# EAGLE board DMB-4771-8-IN-8-OUT (EAGLE 6.5.0)
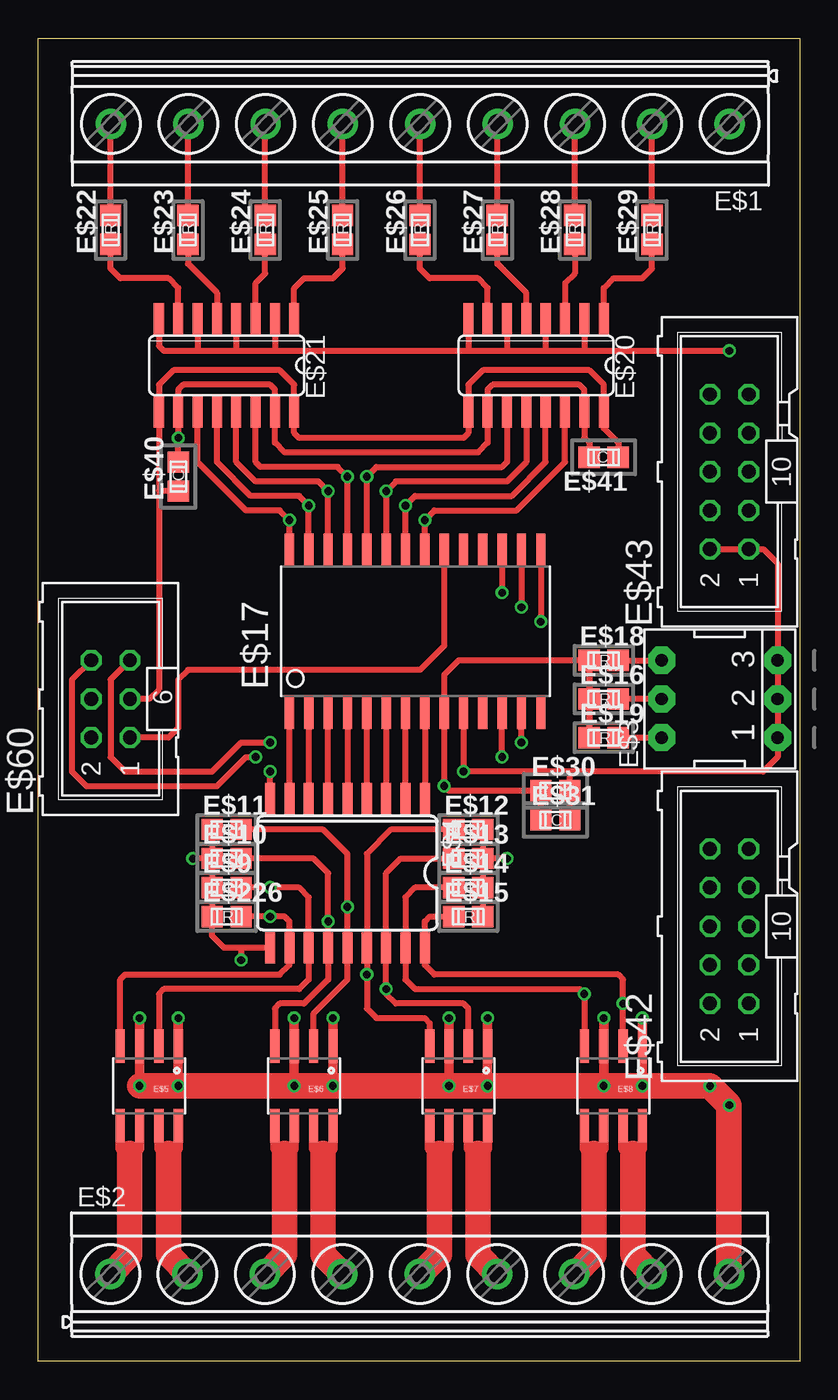
[diagram p0: board, top side]
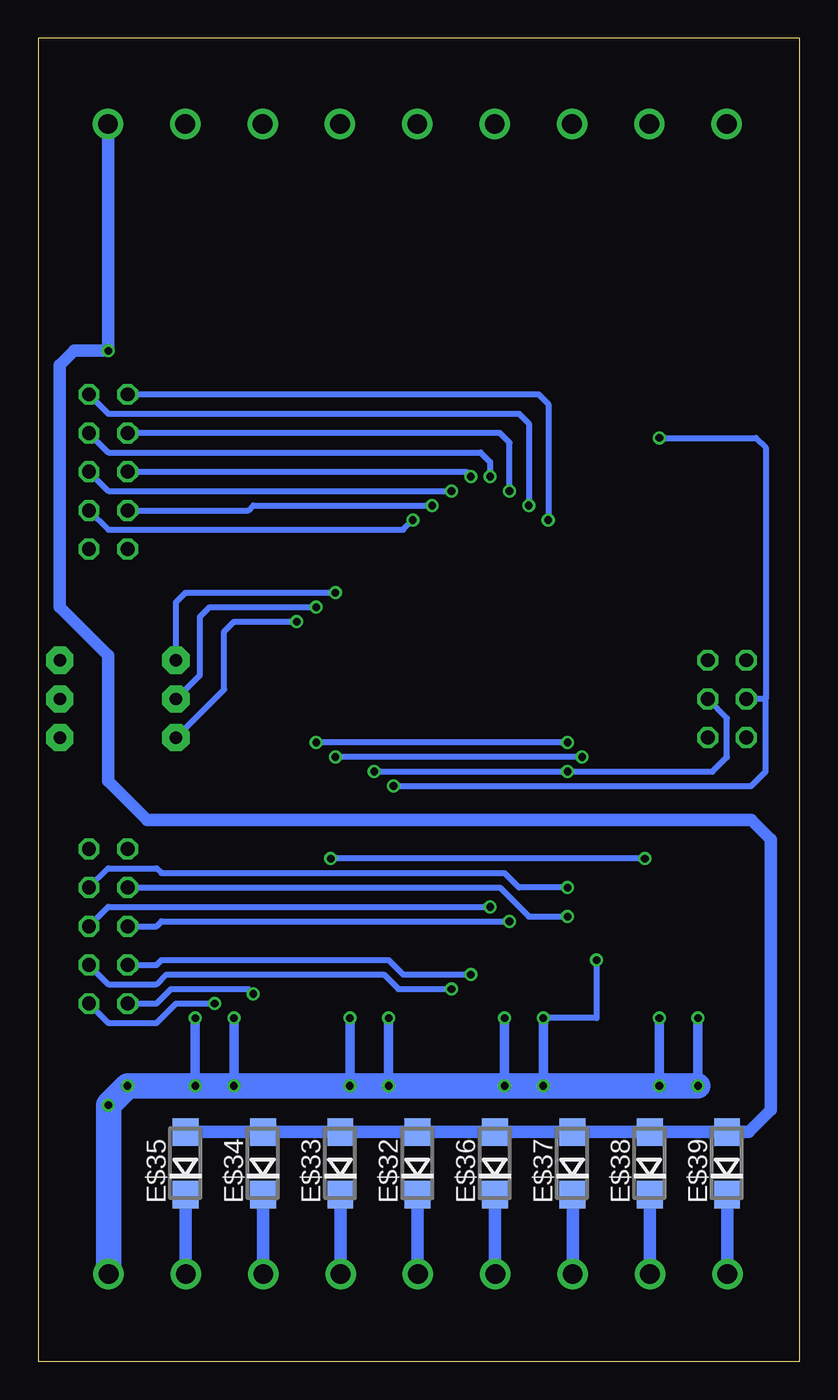
[diagram p1: board, bottom side, seen from below]

Size 50.01 x 86.89 mm. Coordinates in mm from the lower left corner, seen from the top.
Outline: 0,86.89 50.01,86.89 50.01,0 0,0 0,86.89
Copper layers (1*16): Top 0.0356mm / dielectric 1.5011mm / Bottom 0.0356mm
Design rules "LaenPCBOrder": minimum track width 6mil, minimum drill 13mil, track to track 6mil, track to pad 6mil, pad to pad 6mil, via to via 6mil, smd to smd 6mil, copper to edge 15mil, drill to drill 6mil, minimum pad ring 7mil, minimum via ring 7mil, stop-mask expansion 3mil, vias tented up to drill 0mil, thermal gap 10mil

## Footprints (pad centres in the part's own frame; a part is rotated, then mirrored left to right if it is on the bottom)
MKDSN1,5/9-5,08 = drill 1.3 pad 2: 1 -20.341,0.025; 2 -15.261,0.025; 3 -10.181,0.025; 4 -5.101,0.025; 5 -0.021,0.025; 6 5.059,0.025; 7 10.139,0.025; 8 15.219,0.025; 9 20.299,0.025
EPG-03-SMALL = drill 0.813 pad 1.778 octagon: 1 -2.54,-3.81; 2 0,-3.81; 3 2.54,-3.81; 4 2.54,3.81; 5 0,3.81; 6 -2.54,3.81
SO18L = smd 0.66 x 2.032: 1 -0.635,-4.902; 2 0.635,-4.902; 3 1.905,-4.902; 4 3.175,-4.902; 5 4.445,-4.902; 6 5.715,-4.902; 7 6.985,-4.902; 8 8.255,-4.902; 9 9.525,-4.902; 10 9.525,4.902; 11 8.255,4.902; 12 6.985,4.902; 13 5.715,4.902; 14 4.445,4.902; 15 3.175,4.902; 16 1.905,4.902; 17 0.635,4.902; 18 -0.635,4.902
SOIC8 = smd 0.61 x 2.21: 1 -1.905,-2.616; 2 -0.635,-2.616; 3 0.635,-2.616; 4 1.905,-2.616; 5 1.905,2.616; 6 0.635,2.616; 7 -0.635,2.616; 8 -1.905,2.616
R0805 = smd 1.397 x 1.397: 1 -0.953,0; 2 0.953,0
SO28-3 = smd 0.61 x 2.21: 1 -8.255,-5.315; 2 -6.985,-5.315; 3 -5.715,-5.315; 4 -4.445,-5.315; 5 -3.175,-5.315; 6 -1.905,-5.315; 7 -0.635,-5.315; 8 0.635,-5.315; 9 1.905,-5.315; 10 3.175,-5.315; 11 4.445,-5.315; 12 5.715,-5.315; 13 6.985,-5.315; 14 8.255,-5.315; 15 8.255,5.315; 16 6.985,5.315; 17 5.715,5.315; 18 4.445,5.315; 19 3.175,5.315; 20 1.905,5.315; 21 0.635,5.315; 22 -0.635,5.315; 23 -1.905,5.315; 24 -3.175,5.315; 25 -4.445,5.315; 26 -5.715,5.315; 27 -6.985,5.315; 28 -8.255,5.315
SO16 = smd 0.66 x 2.032: 1 -4.445,-3.073; 2 -3.175,-3.073; 3 -1.905,-3.073; 4 -0.635,-3.073; 5 0.635,-3.073; 6 1.905,-3.073; 7 3.175,-3.073; 8 4.445,-3.073; 9 4.445,3.073; 10 3.175,3.073; 11 1.905,3.073; 12 0.635,3.073; 13 -0.635,3.073; 14 -1.905,3.073; 15 -3.175,3.073; 16 -4.445,3.073
C0805 = smd 1.397 x 1.397: 1 -0.953,0; 2 0.953,0
DO214AC = smd 1.8 x 1.7: A 2.05,0; C -2.05,0
ML10 = drill 0.914 octagon: 1 -5.08,-1.27; 2 -5.08,1.27; 3 -2.54,-1.27; 4 -2.54,1.27; 5 0,-1.27; 6 0,1.27; 7 2.54,-1.27; 8 2.54,1.27; 9 5.08,-1.27; 10 5.08,1.27
ML6 = drill 0.914 octagon: 1 -2.54,-1.27; 2 -2.54,1.27; 3 0,-1.27; 4 0,1.27; 5 2.54,-1.27; 6 2.54,1.27

## Placement (x,y rotation side)
E$1  [MKDSN1,5/9-5,08]  25.08,81.28 180 top
E$2  [MKDSN1,5/9-5,08]  25.08,5.71 0 top
E$3  [EPG-03-SMALL]  44.77,43.5 90 top
E$4  ULN2803  [SO18L]  24.77,32.07 180 top
E$5  [SOIC8]  7.3,18.1 180 top
E$6  [SOIC8]  17.46,18.1 180 top
E$7  [SOIC8]  27.62,18.1 180 top
E$8  [SOIC8]  37.78,18.1 180 top
E$9  10K  [R0805]  12.38,31.11 0 top
E$10  10K  [R0805]  12.38,33.02 0 top
E$11  10K  [R0805]  12.38,34.92 0 top
E$12  10K  [R0805]  28.26,34.92 0 top
E$13  10K  [R0805]  28.26,33.02 0 top
E$14  10K  [R0805]  28.26,31.11 0 top
E$15  10K  [R0805]  28.26,29.21 0 top
E$16  10K  [R0805]  37.15,43.5 0 top
E$17  MCP23017  [SO28-3]  24.77,47.94 0 top
E$18  10K  [R0805]  37.15,46.04 0 top
E$19  10K  [R0805]  37.15,40.96 0 top
E$20  ACSL-6400  [SO16]  32.7,65.41 180 top
E$21  ACSL-6400  [SO16]  12.38,65.41 180 top
E$22  1.30K  [R0805]  4.76,74.3 90 top
E$23  1.30K  [R0805]  9.84,74.3 90 top
E$24  1.30K  [R0805]  14.92,74.3 90 top
E$25  1.30K  [R0805]  20,74.3 90 top
E$26  1.30K  [R0805]  25.08,74.3 90 top
E$27  1.30K  [R0805]  30.16,74.3 90 top
E$28  1.30K  [R0805]  35.24,74.3 90 top
E$29  1.30K  [R0805]  40.32,74.3 90 top
E$30  100n  [C0805]  33.97,37.47 0 top
E$31  1u  [C0805]  33.97,35.56 0 top
E$32  [DO214AC]  25.08,13.02 90 bottom
E$33  [DO214AC]  30.16,13.02 90 bottom
E$34  [DO214AC]  35.24,13.02 90 bottom
E$35  [DO214AC]  40.32,13.02 90 bottom
E$36  [DO214AC]  20,13.02 90 bottom
E$37  [DO214AC]  14.92,13.02 90 bottom
E$38  [DO214AC]  9.84,13.02 90 bottom
E$39  [DO214AC]  4.76,13.02 90 bottom
E$40  100n  [C0805]  9.21,58.1 90 top
E$41  100n  [C0805]  37.15,59.37 180 top
E$42  [ML10]  45.4,28.57 90 top
E$43  [ML10]  45.4,58.42 90 top
E$60  [ML6]  4.76,43.5 90 top
E$226  10K  [R0805]  12.38,29.21 0 top

## Library data of the parts
E$1 E$2 = con-phoenix-508
E$3 = special
E$4 = SparkFun-PowerIC
E$5-E$8 = SparkFun-AnalogIC
E$9-E$16 E$18 E$19 E$22-E$31 E$40 E$41 E$226 = divers
E$17 = burr-brown
E$20 E$21 = linear
E$32-E$39 = ref-packages
E$42 E$43 E$60 = con-harting-ml

## Nets
3V3: E$16.1 E$17.9 E$18.1 E$19.1 E$20.10 E$20.15 E$21.10 E$21.15 E$30.1 E$31.1 E$40.2 E$41.2 E$60.4
GND: E$3.1 E$3.2 E$3.3 E$4.9 E$17.10 E$20.9 E$20.16 E$21.9 E$21.16 E$30.2 E$31.2 E$40.1 E$41.1 E$43.1 E$43.2 E$60.3
INT1: E$17.20 E$60.1
POWER_GND: E$1.1 E$20.2 E$20.4 E$20.6 E$20.8 E$21.2 E$21.4 E$21.6 E$21.8 E$32.A E$33.A E$34.A E$35.A E$36.A E$37.A E$38.A E$39.A
S$9: E$2.9 E$4.10 E$5.1 E$5.3 E$6.1 E$6.3 E$7.1 E$7.3 E$8.1 E$8.3 E$9.1 E$10.1 E$11.1 E$12.2 E$13.2 E$14.2 E$15.2 E$226.1
S$11: E$2.1 E$5.5 E$5.6 E$39.C
S$13: E$2.2 E$5.7 E$5.8 E$38.C
S$14: E$2.3 E$6.5 E$6.6 E$37.C
S$15: E$17.28 E$21.11 E$43.10
S$16: E$2.5 E$7.5 E$7.6 E$32.C
S$20: E$4.11 E$5.4 E$42.8 E$226.2
S$21: E$4.12 E$5.2 E$9.2 E$42.7
S$23: E$4.13 E$6.4 E$10.2 E$42.6
S$25: E$4.14 E$6.2 E$11.2 E$42.5
S$28: E$4.15 E$7.4 E$12.1 E$42.4
S$29: E$4.16 E$7.2 E$13.1 E$42.3
S$31: E$4.17 E$8.4 E$14.1 E$42.2
S$32: E$4.18 E$8.2 E$15.1 E$42.1
S$33: E$4.8 E$17.1
S$34: E$4.7 E$17.2
S$35: E$4.6 E$17.3
S$38: E$4.5 E$17.4
S$39: E$4.4 E$17.5
S$40: E$4.3 E$17.6
S$41: E$4.2 E$17.7
S$42: E$4.1 E$17.8
S$55: E$3.4 E$17.17 E$18.2
S$59: E$3.5 E$16.2 E$17.16
S$66: E$3.6 E$17.15 E$19.2
S$67: E$2.6 E$7.7 E$7.8 E$33.C
S$68: E$2.7 E$8.5 E$8.6 E$34.C
S$70: E$2.8 E$8.7 E$8.8 E$35.C
S$71: E$2.4 E$6.7 E$6.8 E$36.C
S$74: E$21.7 E$22.1
S$75: E$21.5 E$23.1
S$76: E$21.3 E$24.1
S$77: E$1.9 E$22.2
S$78: E$1.8 E$23.2
S$79: E$1.7 E$24.2
S$80: E$1.6 E$25.2
S$81: E$1.5 E$26.2
S$82: E$1.4 E$27.2
S$83: E$1.3 E$28.2
S$84: E$1.2 E$29.2
S$85: E$21.1 E$25.1
S$86: E$20.7 E$26.1
S$90: E$17.27 E$21.12 E$43.9
S$91: E$17.26 E$21.13 E$43.8
S$92: E$17.25 E$21.14 E$43.7
S$93: E$17.24 E$20.11 E$43.6
S$94: E$17.23 E$20.12 E$43.5
S$95: E$17.22 E$20.13 E$43.4
S$96: E$17.21 E$20.14 E$43.3
S$97: E$20.5 E$27.1
S$98: E$20.3 E$28.1
S$99: E$20.1 E$29.1
SCL: E$17.12 E$60.6
SDA: E$17.13 E$60.5

## Tracks (layer width: path | path; a pad name or v marks a point on that pad's centre or on a via)
3V3  (via drill 0.5)
  Top 0.406: E$31.1 E$30.1 26.99,37.47 v26.67,37.78 E$17.9 26.67,45.09 27.62,46.04 E$18.1 E$19.1 E$16.1 E$18.1 | E$40.2 v9.21,60.64 E$21.10 9.21,63.82 9.53,64.14 15.24,64.14 15.56,63.82 E$21.15 15.56,60.33 16.19,59.69 28.89,59.69 29.53,60.33 E$20.10 29.53,63.82 29.84,64.14 35.56,64.14 35.88,63.82 E$20.15 35.88,60.64 36.2,60.33 E$41.2
  Bottom 0.406: v26.67,37.78 3.17,37.78 2.22,38.73 2.22,43.5 | v9.21,60.64 2.86,60.64 2.22,60.01 2.22,43.5 | 2.22,43.5 E$60.4
GND  (via drill 0.5)
  Top 0.406: E$17.10 v27.94,38.73 34.92,38.73 | E$4.9 v15.24,38.73 | 34.92,38.73 47.62,38.73 48.58,39.69 E$3.1 E$3.2 E$3.3 48.58,52.39 47.62,53.34 E$43.1 E$43.2 | 34.92,38.73 E$30.2 E$31.2 | 7.94,57.15 E$21.9 7.94,64.14 8.89,65.09 15.88,65.09 16.83,64.14 E$21.16 16.83,60.96 17.14,60.64 27.94,60.64 28.26,60.96 E$20.9 28.26,64.14 29.21,65.09 36.2,65.09 37.15,64.14 E$20.16 37.15,61.28 38.1,60.33 E$41.1 | 7.94,57.15 7.94,44.13 7.3,43.5 E$60.3 | E$40.1 7.94,57.15
  Bottom 0.406: v27.94,38.73 v15.24,38.73 5.71,38.73 4.76,39.69 4.76,42.23 E$60.3
INT1
  Top 0.406: E$17.20 26.67,46.99 25.08,45.4 9.84,45.4 9.21,44.77 9.21,41.59 8.57,40.96 E$60.1
POWER_GND  (via drill 0.5)
  Top 0.406: E$21.8 7.94,66.67 8.26,66.36 10.48,66.36 | 10.48,66.36 13.02,66.36 | 13.02,66.36 15.56,66.36 | 15.56,66.36 28.26,66.36 | 28.26,66.36 30.8,66.36 | 30.8,66.36 33.34,66.36 | 33.34,66.36 35.88,66.36 | 35.88,66.36 v45.4,66.36 | E$20.2 35.88,66.36 | E$20.4 33.34,66.36 | E$20.6 30.8,66.36 | E$20.8 28.26,66.36 | E$21.2 15.56,66.36 | E$21.4 13.02,66.36 | E$21.6 10.48,66.36
  Bottom 0.813: E$1.1 45.4,81.06 v45.4,66.36 47.62,66.36 48.58,65.41 48.58,49.53 45.4,46.35 45.4,38.1 42.86,35.56 3.17,35.56 1.91,34.29 1.91,16.51 3.35,15.07 E$39.A E$38.A E$37.A E$36.A E$32.A E$33.A E$34.A E$35.A
S$9  (via drill 0.5)
  Top 0.406: E$11.1 E$10.1 | E$10.1 | E$10.1 E$9.1 E$226.1 11.43,27.94 12.21,27.16 E$4.10 13.34,27.16 v13.34,26.35 | E$12.2 E$13.2 | E$13.2 E$14.2 E$15.2 | E$10.1 v10.16,33.02 | v30.8,33.02 E$13.2
  Top 0.61: v6.67,18.1 E$5.3 v6.67,22.54 | v9.21,18.1 E$5.1 v9.21,22.54 | v16.83,18.1 E$6.3 v16.83,22.54 | v19.37,18.1 E$6.1 v19.37,22.54 | v26.99,18.1 E$7.3 v26.99,22.54 | 29.21,18.1 29.53,18.41 E$7.1 v29.53,22.54 | 37.47,18.1 37.15,18.41 E$8.3 v37.15,22.54 | v39.69,18.1 E$8.1 v39.69,22.54
  Top 1.27: 37.47,18.1 v37.15,18.1 | v29.53,18.1 29.21,18.1
  Top 1.676: E$2.9 45.38,16.85 v44.13,18.1 v39.69,18.1 37.47,18.1 | v37.15,18.1 v29.53,18.1 | 29.21,18.1 v26.99,18.1 v19.37,18.1 v16.83,18.1 v9.21,18.1 v6.67,18.1
  Bottom 0.406: v10.16,33.02 v30.8,33.02 | v13.34,26.35 13.34,22.54 v16.83,22.54
  Bottom 0.61: v6.67,22.54 v6.67,18.1 | v9.21,22.54 v9.21,18.1 | v29.53,18.1 v29.53,22.54 | v26.99,22.54 v26.99,18.1 | v16.83,18.1 v16.83,22.54 | v19.37,22.54 v19.37,18.1 | v37.15,22.54 v37.15,18.1 | v39.69,22.54 v39.69,18.1
  Bottom 1.676: E$2.9 45.38,16.85 v44.13,18.1 v39.69,18.1 v37.15,18.1 v29.53,18.1 v26.99,18.1 v19.37,18.1 v16.83,18.1 v9.21,18.1 v6.67,18.1
S$11
  Top 0.61: E$5.5 5.4,13.97 6.03,13.65 | 4.76,5.76 E$2.1 | E$5.6 6.67,13.97 6.35,13.65 6.03,6.99
  Top 1.676: 6.03,13.65 6.03,6.99 4.76,5.71 4.76,5.76
  Bottom 0.813: E$2.1 4.74,10.95 E$39.C
S$13
  Top 0.61: E$5.8 9.21,13.97 8.57,13.65 7.94,13.97 E$5.7
  Top 1.676: 8.57,13.65 8.57,6.99 E$2.2
  Bottom 0.813: E$38.C 9.84,5.76 E$2.2
S$14
  Top 0.61: E$6.5 15.56,13.97 16.19,13.65 | E$6.6 16.83,13.97 16.51,13.65 16.19,6.99
  Top 1.676: 16.19,13.65 16.19,6.99 14.9,5.69 E$2.3
  Bottom 0.813: E$2.3 14.9,10.95 E$37.C
S$15  (via drill 0.5)
  Top 0.406: E$21.11 10.48,59.05 13.65,55.88 15.88,55.88 v16.51,55.24 E$17.28
  Bottom 0.406: E$43.10 17.14,63.5 16.51,62.87 v16.51,55.24
S$16
  Top 0.61: E$7.5 25.72,13.97 26.35,13.65 | E$7.6 26.99,13.97 26.67,13.65 26.35,6.99
  Top 1.676: 26.35,13.65 26.35,6.99 25.06,5.69 E$2.5
  Bottom 0.813: E$32.C 25.08,5.76 E$2.5
S$20  (via drill 0.5)
  Top 0.406: E$226.2 v15.24,29.21 16.19,29.21 16.51,28.89 E$4.11 16.51,26.04 15.88,25.4 5.71,25.4 5.4,25.08 E$5.4
  Bottom 0.406: E$42.8 19.68,31.11 17.78,29.21 v15.24,29.21
S$21  (via drill 0.5)
  Top 0.406: E$9.2 v15.24,31.11 17.14,31.11 17.78,30.48 E$4.12 17.78,25.08 17.14,24.45 8.26,24.45 7.94,24.13 E$5.2
  Bottom 0.406: E$42.7 45.4,32.38 42.23,32.38 41.91,32.07 19.37,32.07 18.41,31.11 v15.24,31.11
S$23  (via drill 0.5)
  Top 0.406: E$10.2 18.1,33.02 19.05,32.07 v19.05,28.89 E$4.13 19.05,25.08 17.46,23.5 15.88,23.5 15.56,23.18 E$6.4
  Bottom 0.406: E$42.6 42.23,28.57 41.91,28.89 v19.05,28.89
S$25  (via drill 0.5)
  Top 0.406: E$11.2 18.73,34.92 20.32,33.34 v20.32,29.84 E$4.14 20.32,25.08 18.1,22.86 E$6.2
  Bottom 0.406: E$42.5 45.4,29.84 v20.32,29.84
S$28  (via drill 0.5)
  Top 0.406: E$12.1 23.18,34.92 21.59,33.34 E$4.15 v21.59,25.4 21.59,23.18 22.23,22.54 25.4,22.54 25.72,22.23 E$7.4
  Bottom 0.406: E$42.4 42.23,26.04 41.91,26.35 26.99,26.35 26.04,25.4 v21.59,25.4
S$29  (via drill 0.5)
  Top 0.406: E$13.1 23.81,33.02 22.86,32.07 E$4.16 v22.86,24.45 22.86,24.13 23.5,23.5 27.94,23.5 28.26,23.18 E$7.2 | E$13.1
  Bottom 0.406: E$42.3 45.4,24.77 42.23,24.77 41.59,25.4 27.3,25.4 26.35,24.45 v22.86,24.45
S$31  (via drill 0.5)
  Top 0.406: E$14.1 24.77,31.11 24.13,30.48 E$4.17 24.13,25.08 24.77,24.45 35.56,24.45 v35.88,24.13 E$8.4
  Bottom 0.406: E$42.2 42.23,23.5 41.27,24.45 36.2,24.45 v35.88,24.13
S$32  (via drill 0.5)
  Top 0.406: E$15.1 25.72,29.21 25.4,28.89 E$4.18 25.4,26.04 26.04,25.4 38.1,25.4 38.42,25.08 v38.42,23.5 E$8.2 | E$15.1
  Bottom 0.406: E$42.1 45.4,22.23 42.23,22.23 40.96,23.5 v38.42,23.5
S$33
  Top 0.406: E$4.8 E$17.1
S$34
  Top 0.406: E$17.2 E$4.7
S$35
  Top 0.406: E$4.6 E$17.3
S$38
  Top 0.406: E$17.4 E$4.5
S$39
  Top 0.406: E$4.4 E$17.5
S$40
  Top 0.406: E$17.6 E$4.3
S$41
  Top 0.406: E$4.2 E$17.7
S$42
  Top 0.406: E$17.8 E$4.1
S$55  (via drill 0.5)
  Top 0.406: E$18.2 E$3.4 | E$17.17 v30.48,50.48
  Bottom 0.406: E$3.4 40.96,49.85 40.32,50.48 v30.48,50.48
S$59  (via drill 0.5)
  Top 0.406: E$3.5 E$16.2 | E$17.16 v31.75,49.53
  Bottom 0.406: E$3.5 39.37,45.09 39.37,48.9 38.73,49.53 v31.75,49.53
S$66  (via drill 0.5)
  Top 0.406: E$19.2 E$3.6 | E$17.15 v33.02,48.58
  Bottom 0.406: E$3.6 37.78,44.13 37.78,47.94 37.15,48.58 v33.02,48.58
S$67
  Top 0.61: E$7.8 29.53,13.97 28.89,13.65 28.26,13.97 E$7.7
  Top 1.676: 28.89,13.65 28.89,6.99 E$2.6
  Bottom 0.813: E$33.C 30.16,5.76 E$2.6
S$68
  Top 0.61: E$8.5 35.88,13.97 36.51,13.65 | E$8.6 37.15,13.97 36.83,13.65 36.51,6.99
  Top 1.676: 36.51,13.65 36.51,6.99 35.22,5.69 E$2.7
  Bottom 0.813: E$34.C 35.24,5.76 E$2.7
S$70
  Top 0.61: E$8.8 39.69,13.97 39.05,13.65 38.42,13.97 E$8.7
  Top 1.676: 39.05,13.65 39.05,6.99 E$2.8
  Bottom 0.813: E$35.C 40.32,5.76 E$2.8
S$71
  Top 0.61: E$6.8 19.37,13.97 18.73,13.65 18.1,13.97 E$6.7
  Top 1.676: 18.73,13.65 18.73,6.99 E$2.4
  Bottom 0.813: E$36.C 20,5.76 E$2.4
S$73  (via drill 0.5)
  other vias: 45.4,16.83
S$74
  Top 0.406: E$21.7 9.21,70.48 8.57,71.12 5.4,71.12 4.76,71.75 E$22.1
S$75
  Top 0.406: E$23.1 9.84,72.07 11.75,70.17 E$21.5
S$76
  Top 0.406: E$21.3 14.29,70.8 14.92,71.44 E$24.1
S$77
  Top 0.406: E$22.2 4.76,79.42 E$1.9
S$78
  Top 0.406: E$23.2 9.84,80.38 E$1.8
S$79
  Top 0.406: E$24.2 14.92,80.39 E$1.7
S$80
  Top 0.406: E$25.2 20,80.39 E$1.6
S$81
  Top 0.406: E$26.2 25.08,81.35 E$1.5
S$82
  Top 0.406: E$27.2 30.16,81.04 E$1.4
S$83
  Top 0.406: E$28.2 35.24,81.05 E$1.3
S$84
  Top 0.406: E$29.2 40.32,81.06 E$1.2
S$85
  Top 0.406: E$21.1 16.83,70.48 17.46,71.12 19.37,71.12 20,71.75 E$25.1
S$86
  Top 0.406: E$20.7 29.53,70.48 28.89,71.12 25.72,71.12 25.08,71.75 E$26.1
S$90  (via drill 0.5)
  Top 0.406: E$17.27 v17.78,56.2 17.14,56.83 13.97,56.83 11.75,59.05 E$21.12
  Bottom 0.406: E$43.9 45.4,62.23 18.41,62.23 17.78,61.59 v17.78,56.2
S$91  (via drill 0.5)
  Top 0.406: E$17.26 v19.05,57.15 18.41,57.78 14.29,57.78 13.02,59.05 E$21.13
  Bottom 0.406: v19.05,57.15 19.05,60.33 19.68,60.96 E$43.8
S$92  (via drill 0.5)
  Top 0.406: E$17.25 v20.32,58.1 19.68,58.74 14.61,58.74 14.29,59.05 E$21.14
  Bottom 0.406: E$43.7 45.4,59.69 20.95,59.69 20.32,59.05 v20.32,58.1
S$93  (via drill 0.5)
  Top 0.406: E$17.24 v21.59,58.1 22.23,58.74 30.48,58.74 30.8,59.05 E$20.11
  Bottom 0.406: E$43.6 21.91,58.42 v21.59,58.1
S$94  (via drill 0.5)
  Top 0.406: E$20.12 32.07,59.05 30.8,57.78 23.5,57.78 v22.86,57.15 E$17.23
  Bottom 0.406: E$43.5 45.4,57.15 v22.86,57.15
S$95  (via drill 0.5)
  Top 0.406: E$17.22 v24.13,56.2 24.77,56.83 31.11,56.83 33.34,59.05 E$20.13
  Bottom 0.406: E$43.4 36.2,55.88 35.88,56.2 v24.13,56.2
S$96  (via drill 0.5)
  Top 0.406: E$17.21 v25.4,55.24 26.04,55.88 31.43,55.88 34.61,59.05 E$20.14
  Bottom 0.406: E$43.3 45.4,54.61 26.04,54.61 v25.4,55.24
S$97
  Top 0.406: E$20.5 32.07,70.17 30.16,72.07 E$27.1
S$98
  Top 0.406: E$28.1 35.24,71.44 34.61,70.8 E$20.3
S$99
  Top 0.406: E$20.1 37.15,70.48 37.78,71.12 39.69,71.12 40.32,71.75 E$29.1
SCL  (via drill 0.5)
  Top 0.406: E$60.6 2.22,44.77 2.22,38.73 3.17,37.78 11.75,37.78 13.65,39.69 v14.29,39.69 | v30.48,39.69 E$17.12
  Bottom 0.406: v14.29,39.69 v30.48,39.69
SDA  (via drill 0.5)
  Top 0.406: E$60.5 4.76,44.77 4.76,39.69 5.71,38.73 11.43,38.73 13.34,40.64 v15.24,40.64 | v31.75,40.64 E$17.13
  Bottom 0.406: v15.24,40.64 v31.75,40.64